# EAGLE board sistema min (EAGLE 7.6.0)
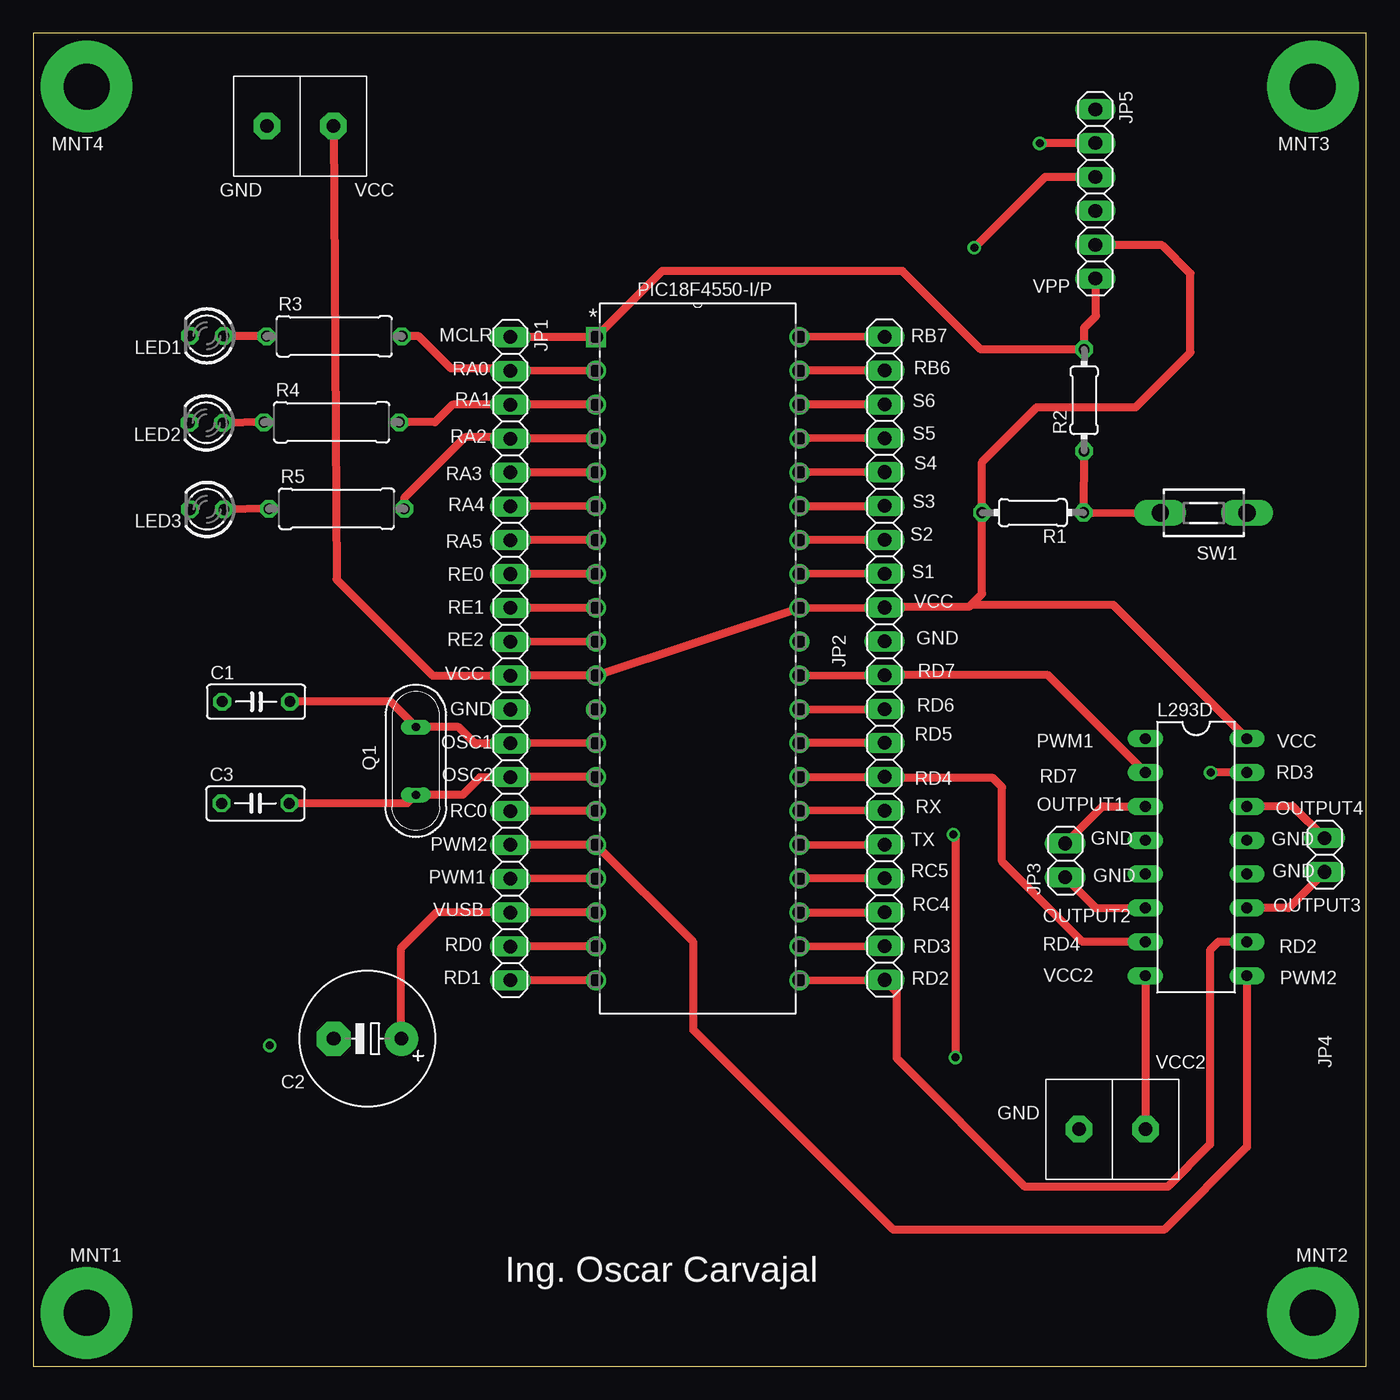
[diagram p0: board, top side]
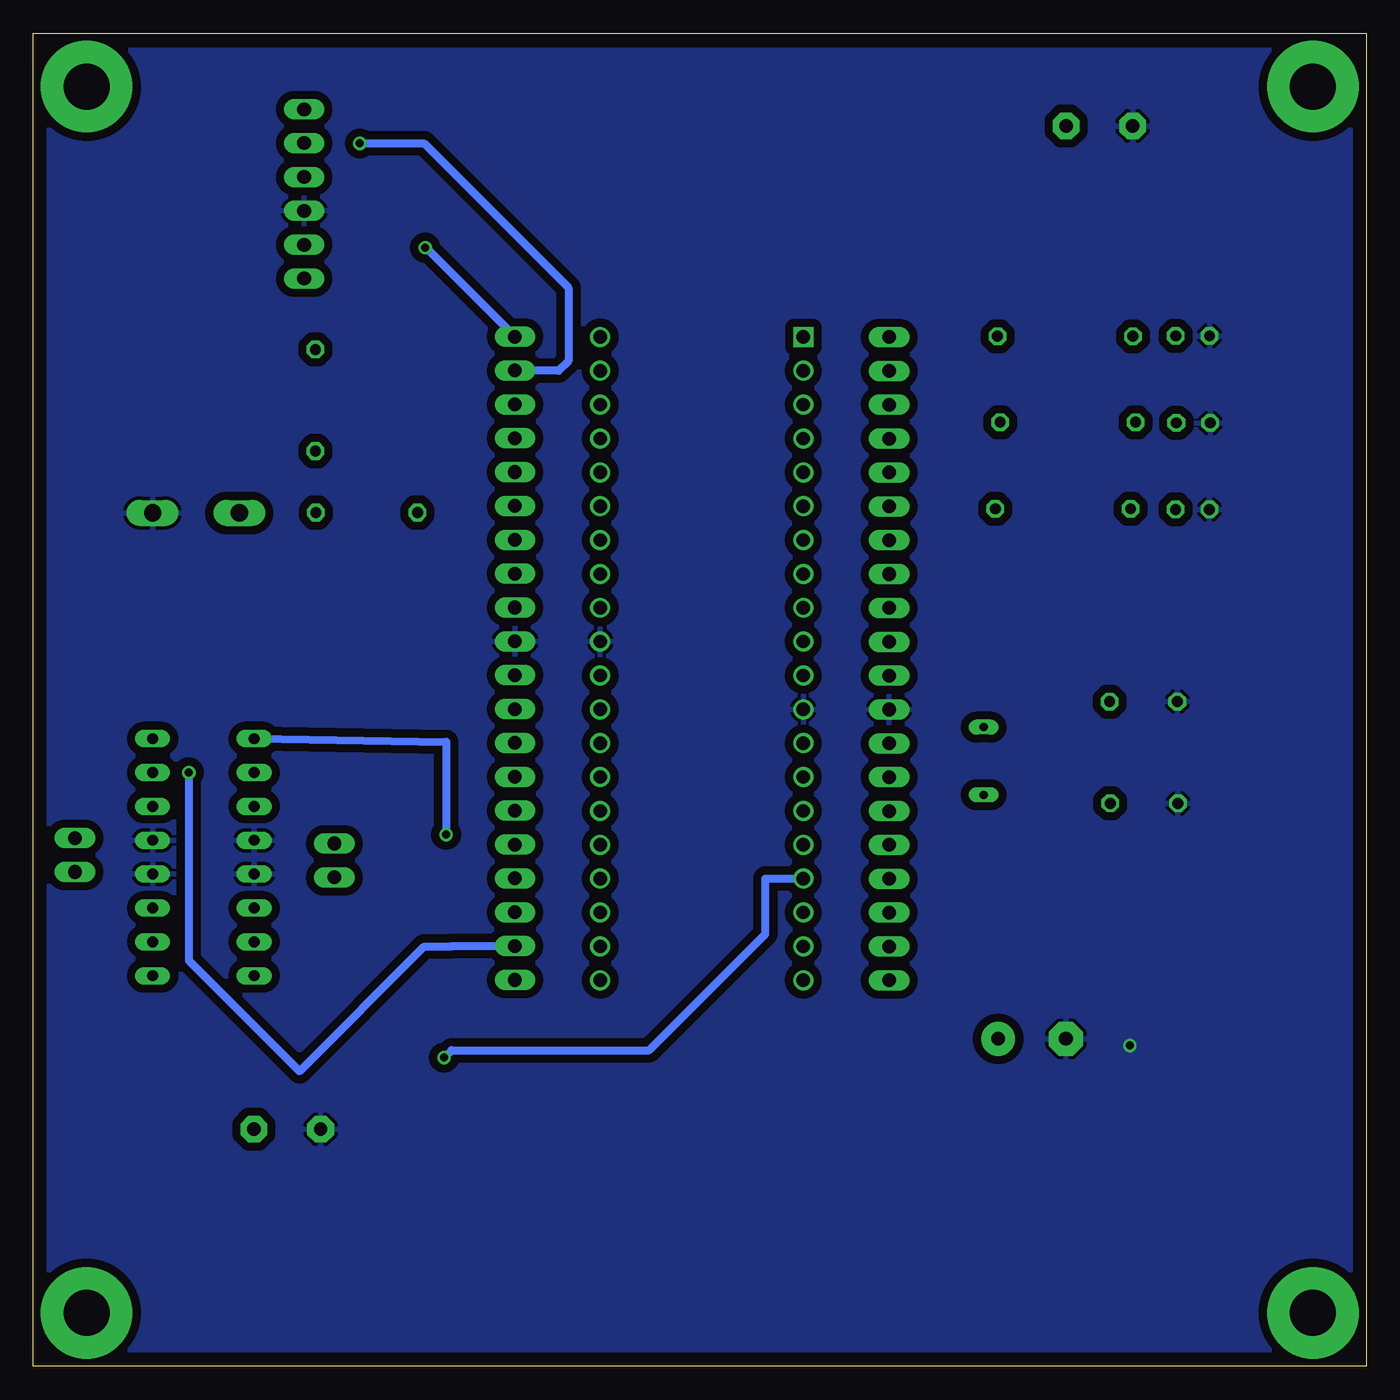
[diagram p1: board, bottom side, seen from below]

Size 100 x 100 mm. Coordinates in mm from the lower left corner, seen from the top.
Outline: 0,0 100,0 100,100 0,100 0,0
Copper layers (1*16): Top 0.035mm / dielectric 1.5mm / Bottom 0.035mm
Design rules "default": minimum track width 10mil, minimum drill 24mil, track to track 8mil, track to pad 8mil, pad to pad 8mil, via to via 8mil, smd to smd 8mil, copper to edge 40mil, drill to drill 8mil, minimum pad ring 10mil, minimum via ring 8mil, stop-mask expansion 4mil, vias tented up to drill 0mil, thermal gap 10mil

## Footprints (pad centres in the part's own frame; a part is rotated, then mirrored left to right if it is on the bottom)
C050-025X075 = drill 0.813 octagon: 1 -2.54,0; 2 2.54,0
E5-10,5 = drill 1.016 pad 2.54: + -2.54,0 | drill 1.016 pad 2.54 octagon: - 2.54,0
1X20 = drill 1.016 long: 1 -24.13,0; 2 -21.59,0; 3 -19.05,0; 4 -16.51,0; 5 -13.97,0; 6 -11.43,0; 7 -8.89,0; 8 -6.35,0; 9 -3.81,0; 10 -1.27,0; 11 1.27,0; 12 3.81,0; 13 6.35,0; 14 8.89,0; 15 11.43,0; 16 13.97,0; 17 16.51,0; 18 19.05,0; 19 21.59,0; 20 24.13,0
1X02 = drill 1.016 long: 1 -1.27,0; 2 1.27,0
1X06 = drill 1.016 long: 1 -6.35,0; 2 -3.81,0; 3 -1.27,0; 4 1.27,0; 5 3.81,0; 6 6.35,0
DIL16 = drill 0.813 long: 1 -8.89,-3.81; 2 -6.35,-3.81; 3 -3.81,-3.81; 4 -1.27,-3.81; 5 1.27,-3.81; 6 3.81,-3.81; 7 6.35,-3.81; 8 8.89,-3.81; 9 8.89,3.81; 10 6.35,3.81; 11 3.81,3.81; 12 1.27,3.81; 13 -1.27,3.81; 14 -3.81,3.81; 15 -6.35,3.81; 16 -8.89,3.81
LED3MM = drill 0.813 octagon: A -1.27,0; K 1.27,0
HOLE_MNT_#5-40 = drill 3.429 pad 6.858: P$1 0,0
DIP254P1524X635-40 = drill 0.991 square: 1 -15.24,48.26 | drill 0.991: 2 -15.24,45.72; 3 -15.24,43.18; 4 -15.24,40.64; 5 -15.24,38.1; 6 -15.24,35.56; 7 -15.24,33.02; 8 -15.24,30.48; 9 -15.24,27.94; 10 -15.24,25.4; 11 -15.24,22.86; 12 -15.24,20.32; 13 -15.24,17.78; 14 -15.24,15.24; 15 -15.24,12.7; 16 -15.24,10.16; 17 -15.24,7.62; 18 -15.24,5.08; 19 -15.24,2.54; 20 -15.24,0; 21 0,0; 22 0,2.54; 23 0,5.08; 24 0,7.62; 25 0,10.16; 26 0,12.7; 27 0,15.24; 28 0,17.78; 29 0,20.32; 30 0,22.86; 31 0,25.4; 32 0,27.94; 33 0,30.48; 34 0,33.02; 35 0,35.56; 36 0,38.1; 37 0,40.64; 38 0,43.18; 39 0,45.72; 40 0,48.26
QS = drill 0.61 long: 1 -2.54,0; 2 2.54,0
0204/7 = drill 0.813 octagon: 1 -3.81,0; 2 3.81,0
0309/10 = drill 0.813 octagon: 1 -5.08,0; 2 5.08,0
DTS-3 = drill 1.3 long: 1 -3.25,0; 2 3.25,0
DBCONN-1X2 = drill 1 pad 2 octagon: P0 -2.54,0; P1 2.46,0

## Placement (x,y rotation side)
C1  22 pF  [C050-025X075]  16.71,49.86 0 top
C2  47uf  [E5-10,5]  25.07,24.56 180 top
C3  22 pF  [C050-025X075]  16.66,42.23 0 top
JP1  [1X20]  35.79,53.08 270 top
JP2  [1X20]  63.86,53.11 270 top
JP3  [1X02]  77.42,37.95 90 top
JP4  [1X02]  96.88,38.35 270 top
JP5  [1X06]  79.68,87.95 270 top
L293D  L293D  [DIL16]  87.24,38.19 270 top
LED1  [LED3MM]  13.02,77.3 180 top
LED2  [LED3MM]  12.97,70.77 180 top
LED3  [LED3MM]  13.03,64.28 180 top
MNT1  HOLE_MNT_0.135  [HOLE_MNT_#5-40]  4,4 0 top
MNT2  HOLE_MNT_0.135  [HOLE_MNT_#5-40]  96,4 0 top
MNT3  HOLE_MNT_0.135  [HOLE_MNT_#5-40]  96,96 180 top
MNT4  HOLE_MNT_0.135  [HOLE_MNT_#5-40]  4,96 180 top
PIC18F4550-I/P  PIC18F4550-I/P  [DIP254P1524X635-40]  57.47,28.96 0 top
Q1  [QS]  28.7,45.41 270 top
R1  10k  [0204/7]  74.99,64.04 180 top
R2  470  [0204/7]  78.84,72.47 90 top
R3  220  [0309/10]  22.58,77.27 0 top
R4  220  [0309/10]  22.38,70.82 0 top
R5  220  [0309/10]  22.75,64.33 0 top
SW1  DTS-3  [DTS-3]  87.8,64.02 180 top
U$2  DBCONN-1X2  [DBCONN-1X2]  20.06,93.05 0 top
U$3  DBCONN-1X2  [DBCONN-1X2]  80.99,17.78 0 top

## Library data of the parts
C1-C3 R1-R5 = rcl
JP1-JP5 = pinhead
L293D = st-microelectronics; MPN: L293D; OC_FARNELL: 9589619; OC_NEWARK: 56P8249
LED1-LED3 = led
MNT1-MNT4 = Existing Library
PIC18F4550-I/P = Microchip_By_element14_Batch_1; DESCRIPTION: USB Microcontrollers; MPN: PIC18F4550-I/P; OC_FARNELL: 9321357; OC_NEWARK: 74K8623; PACKAGE: DIP-40; SUPPLIER: Microchip
Q1 = special
SW1 = switch-tact
U$2 U$3 = Terminal Block Connector

## Nets
GND: C1.1 C2.- C3.1 JP1.12 JP2.10 JP5.4 L293D.4 L293D.5 L293D.12 L293D.13 LED1.K LED2.K LED3.K PIC18F4550-I/P.12 PIC18F4550-I/P.31 SW1.1 U$2.P0 U$3.P0
N$3: R1.1 R2.1 SW1.2
N$4: LED1.A R3.1
N$6: LED2.A R4.1
N$7: LED3.A R5.1
N$10: JP5.1
OSC1: C1.2 JP1.13 PIC18F4550-I/P.13 Q1.1
OSC2: C3.2 JP1.14 PIC18F4550-I/P.14 Q1.2
OUTPUT1: JP3.2 L293D.3
OUTPUT2: JP3.1 L293D.6
OUTPUT3: JP4.2 L293D.11
OUTPUT4: JP4.1 L293D.14
PWM1: JP1.17 L293D.1 PIC18F4550-I/P.17
PWM2: JP1.16 L293D.9 PIC18F4550-I/P.16
RA0: JP1.2 PIC18F4550-I/P.2 R3.2
RA1: JP1.3 PIC18F4550-I/P.3 R4.2
RA2: JP1.4 PIC18F4550-I/P.4 R5.2
RA3: JP1.5 PIC18F4550-I/P.5
RA4: JP1.6 PIC18F4550-I/P.6
RA5: JP1.7 PIC18F4550-I/P.7
RB6: JP2.2 JP5.2 PIC18F4550-I/P.39
RB7: JP2.1 JP5.3 PIC18F4550-I/P.40
RC0: JP1.15 PIC18F4550-I/P.15
RC4: JP2.18 PIC18F4550-I/P.23
RC5: JP2.17 PIC18F4550-I/P.24
RD0: JP1.19 PIC18F4550-I/P.19
RD1: JP1.20 PIC18F4550-I/P.20
RD2: JP2.20 L293D.10 PIC18F4550-I/P.21
RD3: JP2.19 L293D.15 PIC18F4550-I/P.22
RD4: JP2.14 L293D.7 PIC18F4550-I/P.27
RD5: JP2.13 PIC18F4550-I/P.28
RD6: JP2.12 PIC18F4550-I/P.29
RD7: JP2.11 L293D.2 PIC18F4550-I/P.30
RE0: JP1.8 PIC18F4550-I/P.8
RE1: JP1.9 PIC18F4550-I/P.9
RE2: JP1.10 PIC18F4550-I/P.10
RE3: JP1.1 JP5.6 PIC18F4550-I/P.1 R2.2
RX: JP2.15 PIC18F4550-I/P.26
S1: JP2.8 PIC18F4550-I/P.33
S2: JP2.7 PIC18F4550-I/P.34
S3: JP2.6 PIC18F4550-I/P.35
S4: JP2.5 PIC18F4550-I/P.36
S5: JP2.4 PIC18F4550-I/P.37
S6: JP2.3 PIC18F4550-I/P.38
TX: JP2.16 PIC18F4550-I/P.25
VCC: JP1.11 JP2.9 JP5.5 L293D.16 PIC18F4550-I/P.11 PIC18F4550-I/P.32 R1.2 U$2.P1
VCC2: L293D.8 U$3.P1
VUSB: C2.+ JP1.18 PIC18F4550-I/P.18

## Tracks (layer width: path | path; a pad name or v marks a point on that pad's centre or on a via)
GND  (via drill 0.6)
  other vias: 17.73,24.06
  pour Bottom (isolate 0.61): 0.83,1.07 0.83,98.79 99.38,98.79 99.38,0.69 98.91,0.69 98.91,0.9 0.76,0.9
N$3
  Top 0.61: R2.1 R1.1 SW1.2
N$4
  Top 0.61: R3.1 14.29,77.27 LED1.A
N$6
  Top 0.61: R4.1 LED2.A
N$7
  Top 0.61: R5.1 LED3.A
OSC1
  Top 0.61: PIC18F4550-I/P.13 JP1.13 35.77,46.71 33.15,46.71 31.91,47.95 Q1.1 26.79,49.86 C1.2
OSC2
  Top 0.61: PIC18F4550-I/P.14 JP1.14 35.77,44.17 33.51,44.17 32.21,42.87 Q1.2 28.06,42.23 C3.2
OUTPUT1
  Top 0.61: JP3.2 80.21,42.01 80.36,42.01 80.37,42 L293D.3
OUTPUT2
  Top 0.61: JP3.1 79.74,34.36 79.91,34.36 79.93,34.38 L293D.6
OUTPUT3
  Top 0.61: JP4.2 94.18,34.38 L293D.11
OUTPUT4
  Top 0.61: JP4.1 94.5,42 L293D.14
PWM1  (via drill 0.6)
  Top 0.61: PIC18F4550-I/P.17 JP1.17 | v69.03,39.88 69.18,39.8 v69.18,23.16
  Bottom 0.61: L293D.1 69.03,46.85 v69.03,39.88 | v69.18,23.16 68.63,23.71 53.79,23.71 45.07,32.43 45.07,36.57 45.06,36.58 PIC18F4550-I/P.17
PWM2
  Top 0.61: JP1.16 PIC18F4550-I/P.16 49.53,31.82 49.53,25.23 64.52,10.24 84.84,10.24 91.05,16.45 L293D.9
RA0
  Top 0.61: PIC18F4550-I/P.2 JP1.2 35.6,74.86 31.33,74.86 28.92,77.27 R3.2
RA1
  Top 0.61: PIC18F4550-I/P.3 JP1.3 31.44,72.13 30.13,70.82 R4.2
RA2
  Top 0.61: PIC18F4550-I/P.4 JP1.4 35.68,69.7 32.39,69.7 27.83,65.14 R5.2
RA3
  Top 0.61: PIC18F4550-I/P.5 JP1.5
RA4
  Top 0.61: PIC18F4550-I/P.6 JP1.6
RA5
  Top 0.61: PIC18F4550-I/P.7 JP1.7
RB6  (via drill 0.6)
  Top 0.61: JP2.2 PIC18F4550-I/P.39 | JP5.2 75.53,91.76 v75.51,91.74
  Bottom 0.61: v75.51,91.74 70.69,91.74 59.86,80.91 59.86,75.41 60.58,74.69 JP2.2
RB7  (via drill 0.6)
  Top 0.61: JP2.1 PIC18F4550-I/P.40 | JP5.3 75.9,89.22 v70.6,83.92
  Bottom 0.61: v70.6,83.92 70.54,83.92 JP2.1
RC0
  Top 0.61: PIC18F4550-I/P.15 JP1.15
RC4
  Top 0.61: PIC18F4550-I/P.23 JP2.18
RC5
  Top 0.61: JP2.17 PIC18F4550-I/P.24
RD0
  Top 0.61: PIC18F4550-I/P.19 JP1.19
RD1
  Top 0.61: PIC18F4550-I/P.20 JP1.20
RD2
  Top 0.61: PIC18F4550-I/P.21 JP2.20 64.78,28.06 64.78,23.1 74.41,13.47 85.12,13.47 88.28,16.63 88.28,31.21 88.91,31.84 L293D.10
RD3  (via drill 0.6)
  Top 0.61: PIC18F4550-I/P.22 JP2.19 | L293D.15 v88.34,44.54
  Bottom 0.61: v88.34,44.54 88.34,30.44 80.03,22.13 70.68,31.48 68.69,31.48 68.65,31.52 JP2.19
RD4
  Top 0.61: PIC18F4550-I/P.27 JP2.14 63.95,44.13 72,44.13 72.68,43.45 72.68,37.87 78.71,31.84 L293D.7
RD5
  Top 0.61: JP2.13 PIC18F4550-I/P.28
RD6
  Top 0.61: PIC18F4550-I/P.29 JP2.12
RD7
  Top 0.61: PIC18F4550-I/P.30 JP2.11 76.13,51.84 L293D.2
RE0
  Top 0.61: PIC18F4550-I/P.8 JP1.8
RE1
  Top 0.61: PIC18F4550-I/P.9 JP1.9
RE2
  Top 0.61: PIC18F4550-I/P.10 JP1.10
RE3
  Top 0.61: JP1.1 PIC18F4550-I/P.1 47.18,82.17 65.22,82.17 71.11,76.28 R2.2 78.84,77.9 79.73,78.79 79.73,81.55 JP5.6
RX
  Top 0.61: JP2.15 PIC18F4550-I/P.26
S1
  Top 0.61: JP2.8 PIC18F4550-I/P.33
S2
  Top 0.61: JP2.7 PIC18F4550-I/P.34
S3
  Top 0.61: PIC18F4550-I/P.35 JP2.6
S4
  Top 0.61: JP2.5 PIC18F4550-I/P.36
S5
  Top 0.61: JP2.4 PIC18F4550-I/P.37
S6
  Top 0.61: JP2.3 PIC18F4550-I/P.38
TX
  Top 0.61: PIC18F4550-I/P.25 JP2.16
VCC
  Top 0.61: 36.35,51.81 PIC18F4550-I/P.11 PIC18F4550-I/P.32 JP2.9 63.94,57 70.24,57 70.36,57.12 | 36.35,51.81 JP1.11 | 70.36,57.12 71.18,57.94 R1.2 71.18,67.83 75.29,71.94 82.71,71.94 86.82,76.05 86.82,81.97 84.7,84.09 79.73,84.09 JP5.5 | U$2.P1 22.75,59.03 29.97,51.81 36.35,51.81 | L293D.16 81.02,57.12 70.36,57.12
VCC2
  Top 0.61: L293D.8 83.43,17.8 U$3.P1
VUSB
  Top 0.61: PIC18F4550-I/P.18 JP1.18 35.75,34.07 30.29,34.07 27.61,31.39 C2.+

## Text on the board
tNames: GND | VCC | VPP | MCLR | RB7 | RA0 | RB6 | RA1 | S6 | RA2 | S5 | S4 | RA3 | RA4 | S3 | S2 | RA5 | RE0 | S1 | VCC | RE1 | RE2 | GND | RD7 | VCC | GND | RD6 | RD5 | OSC1 | PWM1 | VCC | OSC2 | RD4 | RD7 | RD3 | OUTPUT1 | RC0 | RX | OUTPUT4 | PWM2 | TX | GND | GND | RC5 | GND | PWM1 | GND | VUSB | RC4 | OUTPUT3 | OUTPUT2 | RD0 | RD3 | RD4 | RD2 | RD1 | RD2 | VCC2 | PWM2 | VCC2 | GND | Ing. Oscar Carvajal